# EAGLE board _PortExpanderCP2130 (EAGLE 7.2.0)
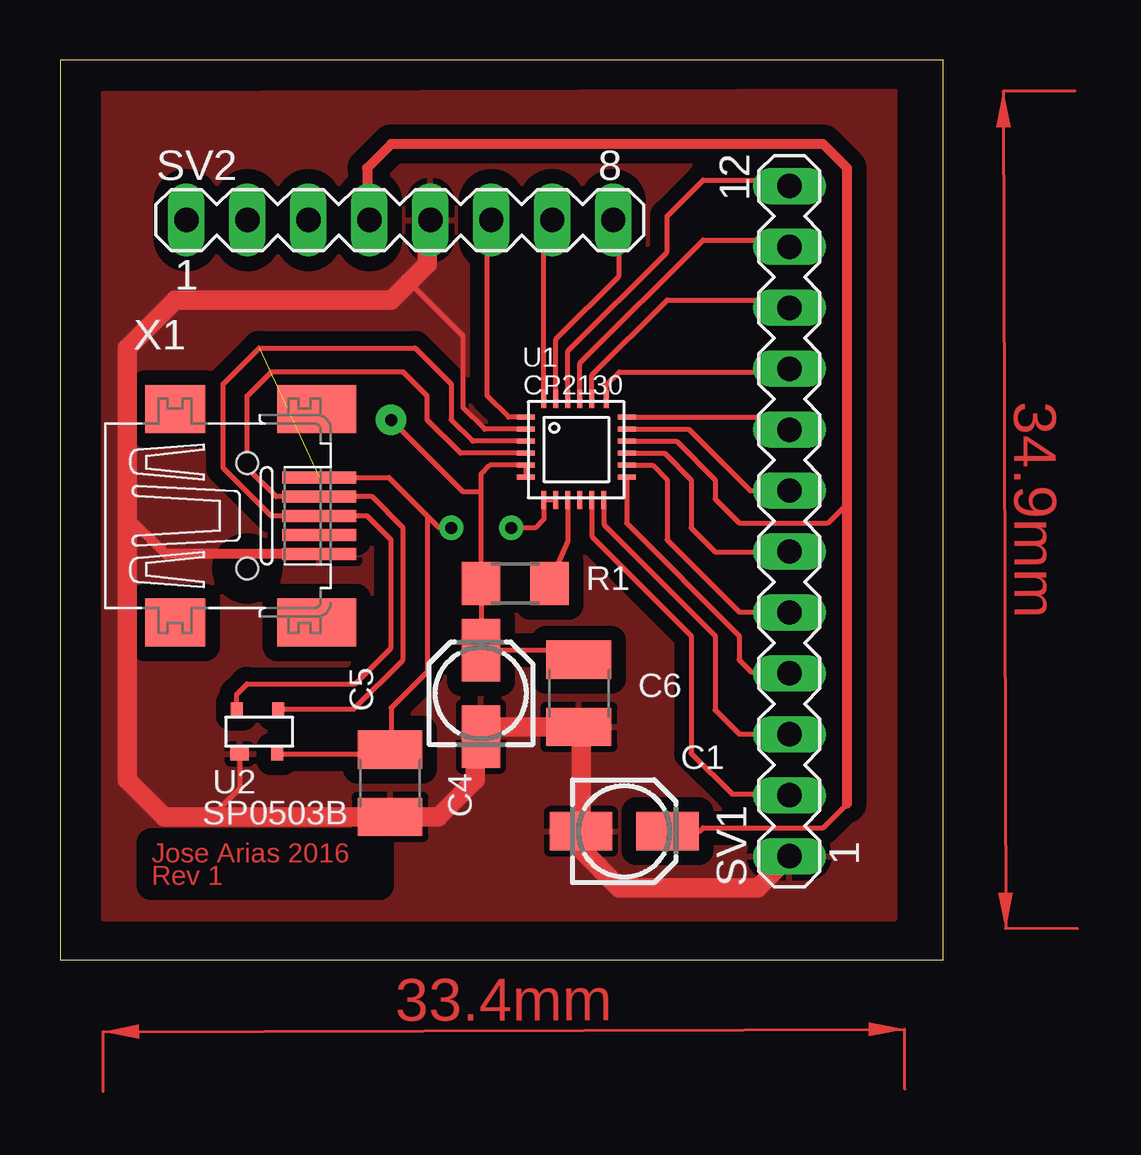
[diagram p0: board, top side]
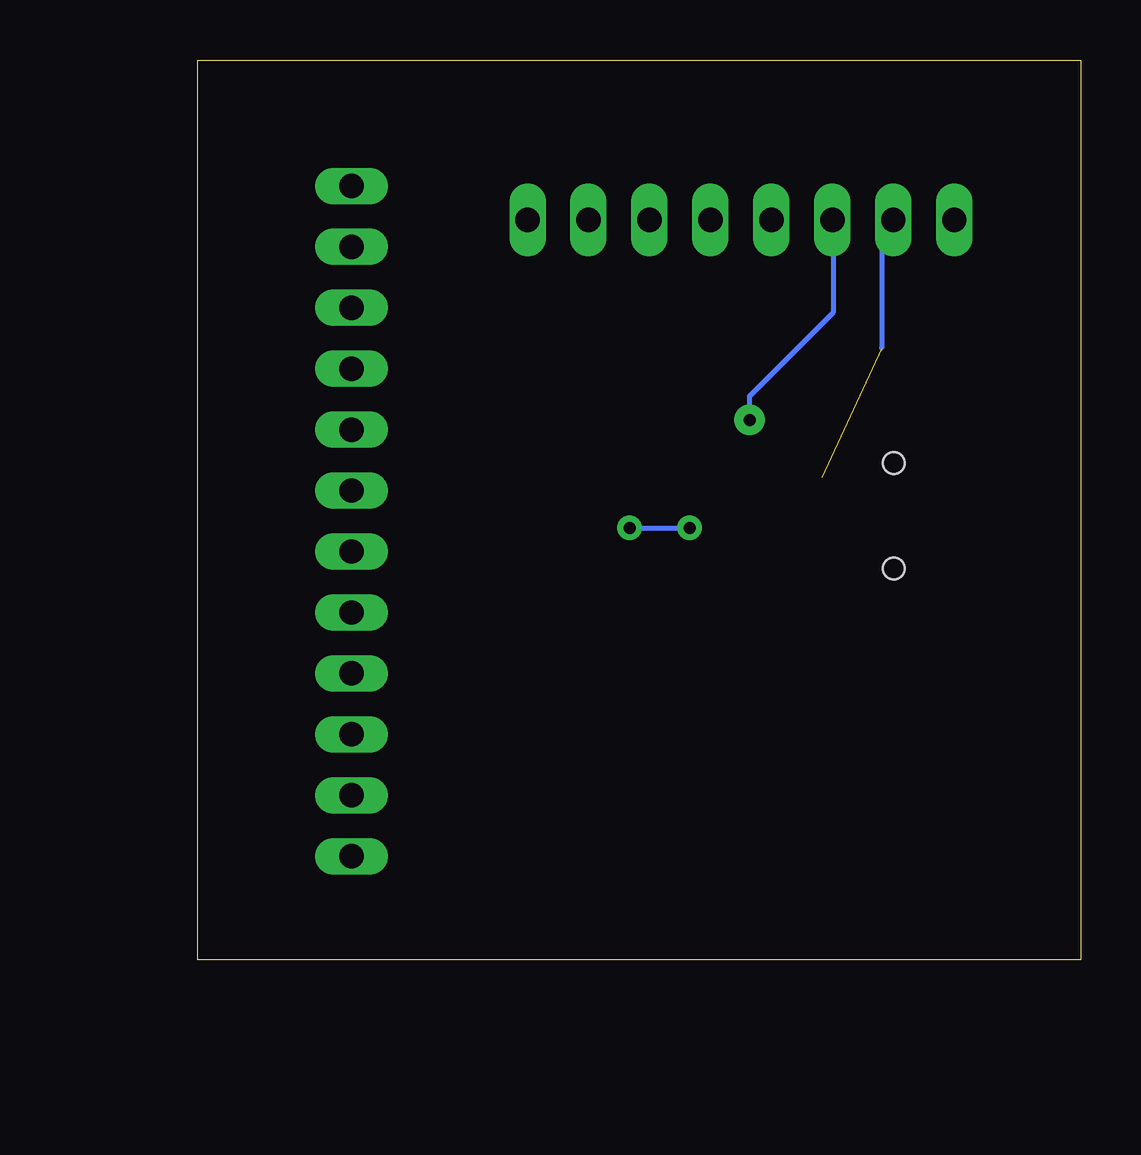
[diagram p1: board, bottom side, seen from below]

Size 36.8 x 37.5 mm. Coordinates in mm from the lower left corner, seen from the top.
Outline: 0,0 36.8,0 36.8,37.5 0,37.5 0,0
Copper layers (1*16): Top 0.035mm / dielectric 1.5mm / Bottom 0.035mm
Design rules "default": minimum track width 10mil, minimum drill 24mil, track to track 8mil, track to pad 8mil, pad to pad 8mil, via to via 8mil, smd to smd 8mil, copper to edge 40mil, drill to drill 8mil, minimum pad ring 10mil, minimum via ring 8mil, stop-mask expansion 4mil, vias tented up to drill 0mil, thermal gap 10mil
Net classes: 0 default: width 0.152 mm; 1 USB_VBUS: width 0.254 mm; 2 GND: width 0.508 mm, clearance 0.127 mm

## Footprints (pad centres in the part's own frame; a part is rotated, then mirrored left to right if it is on the bottom)
153CLV-0405 = smd 2.6 x 1.6: + 1.8,0; - -1.8,0
C1210 = smd 1.6 x 2.7: 1 -1.4,0; 2 1.4,0
R1206 = smd 1.6 x 1.803: 1 -1.422,0; 2 1.422,0
MA12-1 = drill 1.016 long: 1 -13.97,0; 2 -11.43,0; 3 -8.89,0; 4 -6.35,0; 5 -3.81,0; 6 -1.27,0; 7 1.27,0; 8 3.81,0; 9 6.35,0; 10 8.89,0; 11 11.43,0; 12 13.97,0
MA08-1 = drill 1.016 long: 1 -8.89,0; 2 -6.35,0; 3 -3.81,0; 4 -1.27,0; 5 1.27,0; 6 3.81,0; 7 6.35,0; 8 8.89,0
QFN-24 = smd 0.75 x 0.2: 1 -2.1,1.35; 2 -2.1,0.85; 3 -2.1,0.35; 4 -2.1,-0.15; 5 -2.1,-0.65; 6 -2.1,-1.15; 13 2.1,-1.15; 14 2.1,-0.65; 15 2.1,-0.15; 16 2.1,0.35; 17 2.1,0.85; 18 2.1,1.35 | smd 0.2 x 0.75: 7 -1.35,-2.1; 8 -0.85,-2.1; 9 -0.35,-2.1; 10 0.15,-2.1; 11 0.65,-2.1; 12 1.15,-2.1; 19 1.25,2.1; 20 0.65,2.1; 21 0.15,2.1; 22 -0.35,2.1; 23 -0.85,2.1; 24 -1.35,2.1
SOT143 = smd 0.76 x 0.55: 1 -0.82,-0.93 | smd 0.5 x 0.55: 2 0.76,-0.93; 3 0.79,0.94; 4 -0.94,0.94
32005-201 = smd 3.1 x 0.5: 1 3,1.6; 2 3,0.8; 3 3,0; 4 3,-0.8; 5 3,-1.6 | smd 2.5 x 2: M1 -3,-4.45; M2 -3,4.45 | smd 3.3 x 2: M3 2.9,4.45; M4 2.9,-4.45 | hole 0.9: 0,2.2; 0,-2.2

## Placement (x,y rotation side)
C1  4.7uF  [153CLV-0405]  23.51,5.35 0 top
C4  0.1uF  [C1210]  13.75,7.35 270 top
C5  4.7uF  [153CLV-0405]  17.54,11.1 90 top
C6  0.1uF  [C1210]  21.62,11.1 270 top
R1  4.7K  [R1206]  18.97,15.68 180 top
SV1  [MA12-1]  30.39,18.28 90 top
SV2  [MA08-1]  14.16,30.83 0 top
U1  CP2130  [QFN-24]  21.51,21.26 0 top
U2  SP0503B  [SOT143]  8.3,9.5 0 top
X1  MINI-USB-32005-201  [32005-201]  7.8,18.5 0 top

## Library data of the parts
C1 C4-C6 = rcl
R1 = resistor
SV1 SV2 = con-lstb; OC_FARNELL: unknown; OC_NEWARK: unknown
U1 = ExarLib
U2 = HCloudLib
X1 = con-cypressindustries; OC_FARNELL: unknown; OC_NEWARK: unknown

## Nets
GND: C1.- C4.2 C5.- C6.2 SV1.1 SV2.5 U1.2 U2.1 X1.5
GPIO0: SV1.12 U1.22
GPIO1: SV1.11 U1.21
GPIO2: SV1.10 U1.20
GPIO3: SV1.9 U1.19
GPIO4: SV1.8 U1.18
GPIO5: SV1.7 U1.17
GPIO6: SV1.6 U1.15
GPIO7: SV1.5 U1.14
GPIO8: SV1.4 U1.13
GPIO9: SV1.3 U1.12
GPIO10: SV1.2 U1.11
MISO: SV2.7 U1.24
MOSI: SV2.8 U1.23
N$1: R1.1 U1.9
SCK: SV2.6 U1.1
USB_D+: U1.3 U2.4 X1.3
USB_D-: U1.4 U2.3 X1.2
USB_VBUS: C4.1 SV2.2 U1.7 U1.8 U2.2 X1.1
VDD: C5.+ C6.1 R1.2 SV2.3 U1.5 U1.6
VPP: C1.+ SV2.4 U1.16

## Tracks (layer width: path | path; a pad name or v marks a point on that pad's centre or on a via)
GND
  Top 0.2: 17.94,9.7 C5.- | U1.2 17.69,22.11 16.8,23 16.8,26 14.55,28.25 | 30.08,4 SV1.1 | 11.8,17 10.9,16.9 X1.5 | U2.1 7.48,7.13 6.3,5.95
  Top 0.406: 10.9,16.9 4.4,16.9 2.8,18.5
  Top 0.813: 17.94,9.7 C6.2 21.71,9.7 C1.- 21.71,4.59 23.3,3 29.08,3 SV1.1 | C5.- 17.3,9.06 17.3,7.5 15.75,5.95 C4.2 6.3,5.95 4.35,5.95 2.8,7.5 2.8,18.5 2.8,25.5 4.8,27.5 13.8,27.5 14.55,28.25 15.3,29 15.3,30.7 SV2.5
  pour Top (isolate 0.61): 1.8,36.1 1.8,1.7 34.8,1.7 34.8,36.2
GPIO0
  Top 0.2: U1.22 21.16,25.36 25.3,29.5 25.3,31 26.8,32.5 30.14,32.5 SV1.12
GPIO1
  Top 0.2: U1.21 21.66,24.86 26.8,30 30.1,30 SV1.11
GPIO2
  Top 0.2: U1.20 22.16,24.36 25.3,27.5 30.06,27.5 SV1.10
GPIO3
  Top 0.2: U1.19 22.76,23.96 23.3,24.5 30.26,24.5 SV1.9
GPIO4
  Top 0.2: U1.18 29.87,22.61 SV1.8
GPIO5
  Top 0.2: U1.17 26.19,22.11 28.75,19.55 SV1.7
GPIO6
  Top 0.2: U1.15 25.19,21.11 26.3,20 26.3,18 27.3,17 SV1.6
GPIO7
  Top 0.2: U1.14 24.69,20.61 25.3,20 25.3,17.5 28.33,14.47 SV1.5
GPIO8
  Top 0.2: U1.13 23.61,18.19 28.3,13.5 28.3,12.5 28.8,12 30.32,12 SV1.4
GPIO9
  Top 0.2: U1.12 22.66,18.14 27.3,13.5 27.3,10.4 28.3,9.4 SV1.3
GPIO10
  Top 0.2: U1.11 22.16,17.64 26.3,13.5 26.3,8.6 28,6.9 30.34,6.9 SV1.2
MISO
  Top 0.2: U1.24 20.16,30.48 SV2.7
MOSI
  Top 0.2: U1.23 20.66,25.86 23.3,28.5 23.3,30.58 SV2.8
N$1
  Top 0.2: U1.9 21.16,17.45 R1.1
SCK
  Top 0.2: U1.1 18.69,22.61 17.8,23.5 17.8,30.66 SV2.6
USB_D+
  Top 0.2: U1.3 17.19,21.61 16.3,22.5 16.3,24 14.8,25.5 8.3,25.5 6.8,24 6.8,20.5 8.8,18.5 X1.3 12.8,18.5 13.8,17.5 13.8,13 12.3,11.5 7.8,11.5 7.36,11.06 U2.4
USB_D-
  Top 0.2: U1.4 16.69,21.11 15.3,22.5 15.3,23.5 14.3,24.5 8.8,24.5 7.8,23.5 7.8,20.5 9,19.3 X1.2 13,19.3 14.3,18 14.3,12.5 12.24,10.44 U2.3
USB_VBUS  (via drill 0.5 pad 1.02)  (1 unrouted)
  Top 0.2: U1.8 U1.7 20.16,18.36 19.8,18 v18.8,18 | C4.1 13.8,8.8 13.8,10.5 15.3,12 15.3,18.5 | 13.3,9.2 C4.1 | U2.2 13.57,8.57 C4.1 | X1.1 13.7,20.1 15.3,18.5 | v16.3,18 15.8,18 15.3,18.5
  Bottom 0.2: v18.8,18 v16.3,18 | SV2.2 8.13,30.83 8.3,31 8.3,25.5
VDD  (via drill 0.5 pad 1.27)
  Top 0.2: U1.6 U1.5 17.91,20.61 17.55,20.25 17.55,19.5 | C6.1 21.22,12.9 C5.+ R1.2 17.55,19.5 | 17.55,19.5 16.8,19.5 v13.8,22.5
  Bottom 0.2: v13.8,22.5 13.8,23.5 10.3,27 10.3,30.78 SV2.3
VPP
  Top 0.2: U1.16 25.69,21.61 27.3,20 27.3,19.2 28.3,18.2 32,18.2 32.8,19 | 12.8,30.92 SV2.4 | C1.+ 26.65,5.35 26.8,5.5 31.8,5.5 32.8,6.5
  Top 0.406: 12.8,30.92 12.8,33 13.8,34 31.8,34 32.8,33 32.8,19 32.8,6.5
(copper drawn outside any net)
  shapes: Top area x2

## Text on the board
Top: Jose Arias 2016 / Rev 1